# Altium PCB BrushServo_MG995.PcbDoc
Units mm, origin at the board's own origin, x right, y up, seen from the top; angles counter-clockwise.
Board outline 21 x 16 mm, 2 copper layers (Top Layer, Bottom Layer), stack 0.671 mm thick; 22 components, 28 nets, 130 pads, 48 vias.
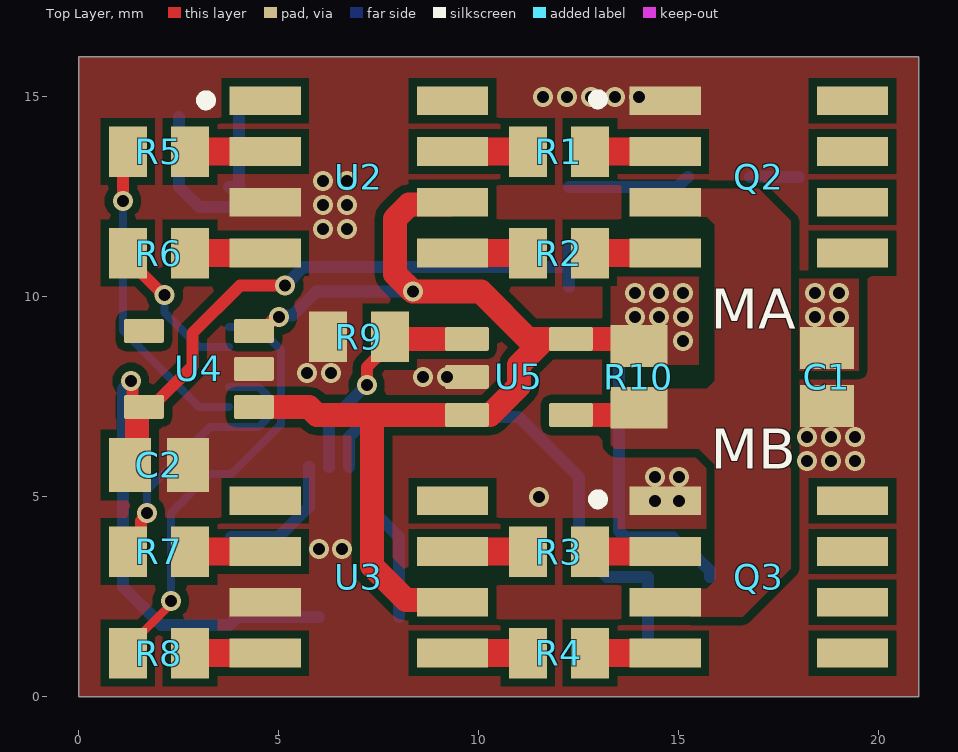
[diagram p0: Top Layer view]
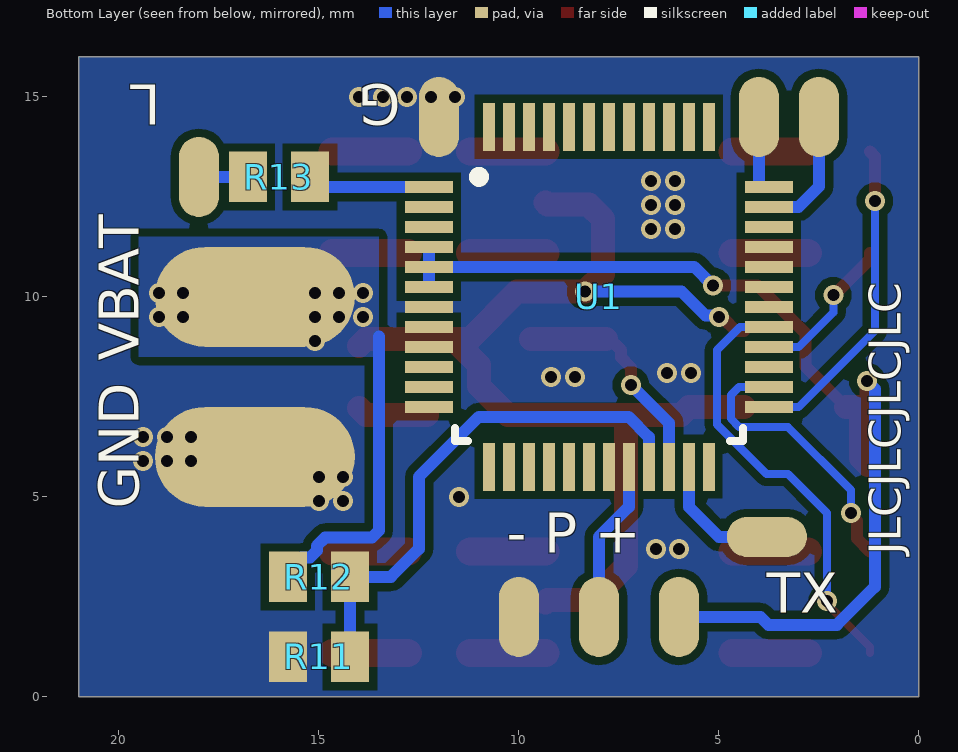
[diagram p1: Bottom Layer view, seen from below]
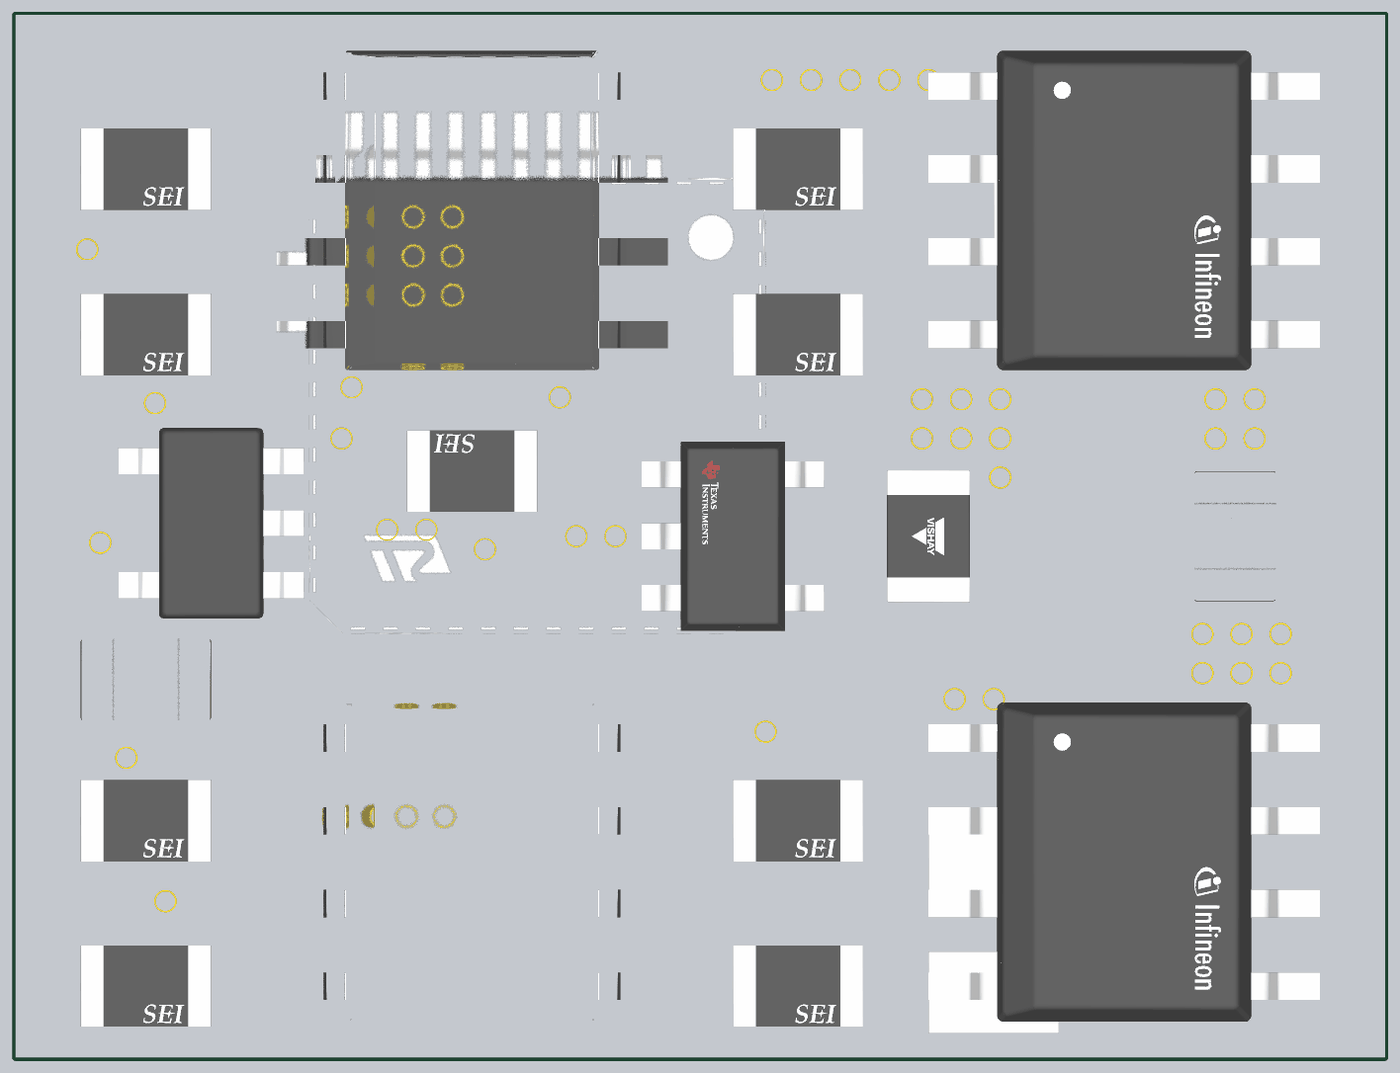
[diagram p2: 3D render of the assembled board from above, using the file's embedded part models]
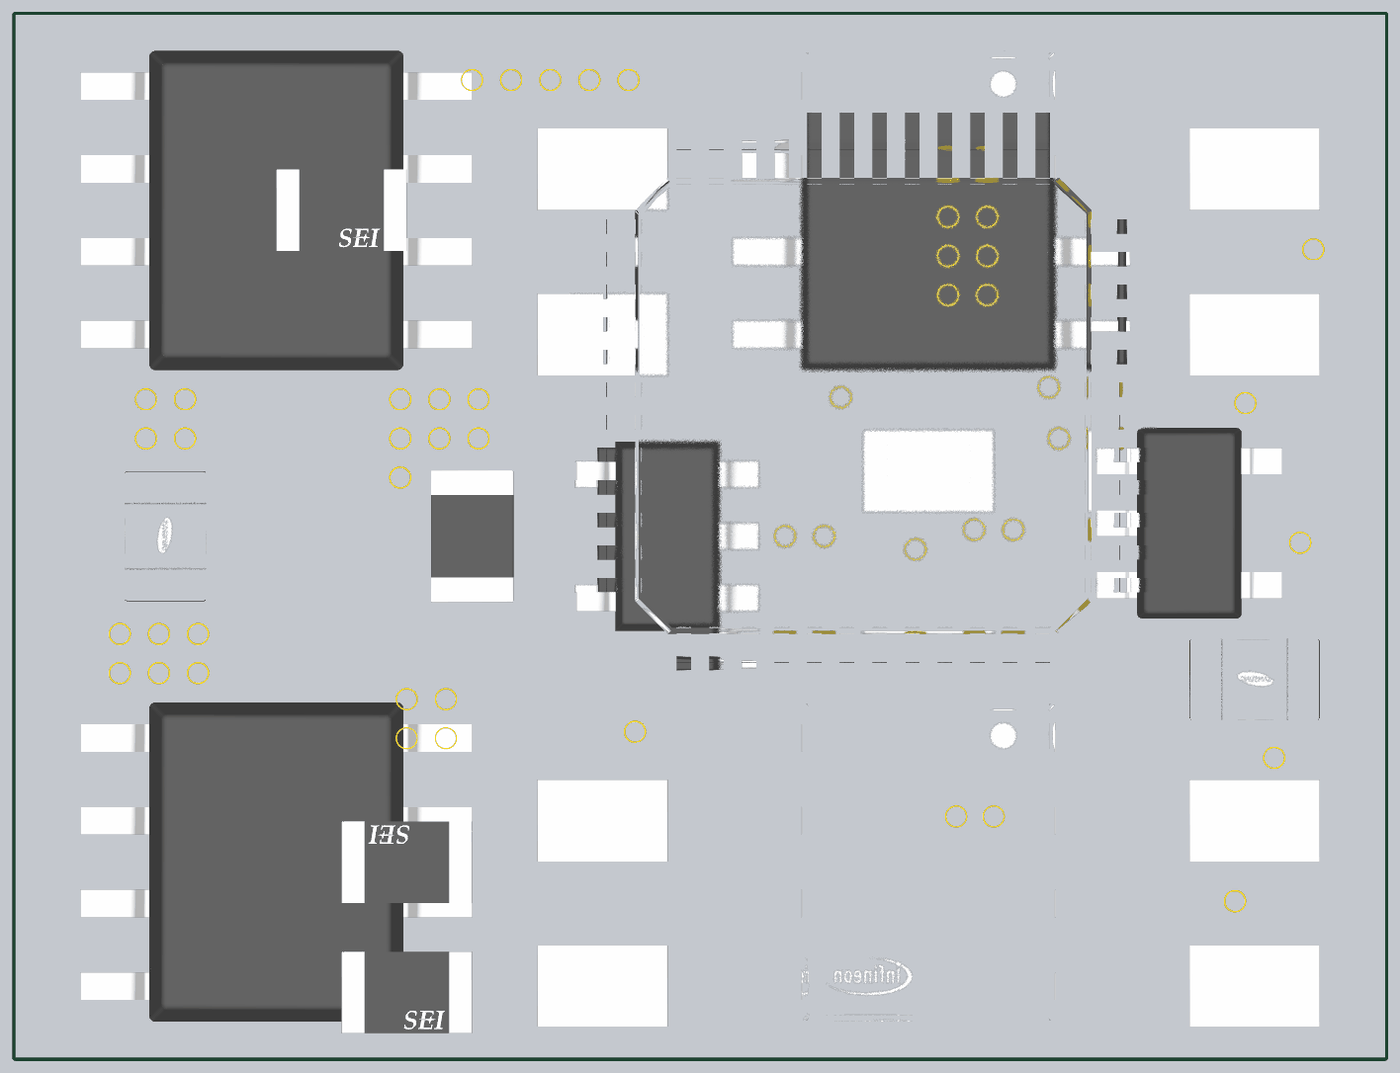
[diagram p3: 3D render of the assembled board from below, using the file's embedded part models]

## Layer stack, top to bottom
Top Solder: solder mask 0.0102, Solder Resist, Dk 3.5
Top Layer: signal copper 0.0356
Dielectric 1: dielectric 0.6, FR-4, Dk 4.8
Bottom Layer: signal copper 0.0356
Bottom Solder: solder mask 0.0102, Solder Resist, Dk 3.5

## Board outline
0,0 21,0 21,16 0,16

## Design rules (kind name [scope] priority, off if disabled: settings)
Clearance [All] p1: gap=0.2 ignorepadtopadclearanceinfootprint=TRUE except(0.15: Arc-Arc Arc-Track Track-Track; 0.3: Via-Via)
MinimumSolderMaskSliver [All] p1: minsoldermaskwidth=0.1
PolygonConnect [All] p1: connectstyle=Direct reliefconductorwidth=0.254 reliefentries=4 polygonreliefangle="90 Angle" airgapwidth=0.254
RoutingVias [All] p1: holewidth=0.3 width=0.5 viastyle="Through Hole" minholewidth=0.3 minwidth=0.5 maxholewidth=1 maxwidth=2
SolderMaskExpansion SolderMaskExpansion_via [IsVia] p1: expansion=0.102 istentingtop=TRUE
SolderMaskExpansion [All] p2: expansion=0.102 istentingtop=FALSE
Width [All] p1: maxlimit=1 minlimit=0.2 preferedwidth=0.3
29 further rules are at their usual default settings.

## Components (designator, comment, footprint, x,y, rotation, side; value= is the part's Value field where it differs from the comment)
C1 "CL21A106KOQNNNG" FP-CL21-IPC_C 18.7,8 r270 top
C2 "CL21A106KOQNNNG" FP-CL21-IPC_C 2,5.8 r0 top
Q2 "IRF7389TRPBF" FP-PG-DSO-8-MFG 17,13 r0 top
Q3 "IRF7389TRPBF" FP-PG-DSO-8-MFG 17,3 r0 top
R1 "RMCF0805FT10R0" FP-RMCF0805-IPC_C 12,13.635 r0 top
R2 "RMCF0805FT10R0" FP-RMCF0805-IPC_C 12,11.095 r0 top
R3 "RMCF0805FT10R0" FP-RMCF0805-IPC_C 12,3.635 r0 top
R4 "RMCF0805FT10R0" FP-RMCF0805-IPC_C 12,1.095 r0 top
R5 "RMCF0805FT330R" FP-RMCF0805-IPC_C 2,13.635 r0 top
R6 "RMCF0805FT330R" FP-RMCF0805-IPC_C 2,11.095 r0 top
R7 "RMCF0805FT330R" FP-RMCF0805-IPC_C 2,3.635 r0 top
R8 "RMCF0805FT330R" FP-RMCF0805-IPC_C 2,1.095 r0 top
R9 "RMCF0805FT10K0" FP-RMCF0805-IPC_C 7,9 r180 top
R10 "WSLP08055L000FEA18" FP-WSLP0805-IPC_C 14,8 r270 top
R11 "RMCF0805FT1K00" FP-RMCF0805-IPC_C 15,1 r180 bottom
R12 "RMCF0805FT2K67" FP-RMCF0805-IPC_C 15,3 r0 bottom
R13 "RMCF0805FT330R" FP-RMCF0805-IPC_C 16,13 r180 bottom
U1 "STM32G071CBT6" FP-LQFP48-5B-MFG 8,10 r180 bottom
U2 "IR4427STRPBF" FP-PG-DSO-8-MFG 7,13 r0 top
U3 "IR4427STRPBF" FP-PG-DSO-8-MFG 7,3 r0 top
U4 "TPS76333DBVR" DBV0005A_N 3,8.2 r180 top
U5 "INA169NA/250" FP-DBV0005A-MFG 11,8 r0 top

## Footprints (in the part's own frame and the unit in brackets; to place one, negate y for a bottom-side part, rotate by r counter-clockwise, add the part's x,y. Pads: shape width x height; smd on the part's side, far side on the other; paste and mask are expansions set on the pad)
DBV0005A_N [mm] "SOT23, 5-Leads, Body 3.05x1.75mm, Pitch 0.95mm, IPC Medium Density"
  rrect17% 1x0.6 smd: 1(-1.375,0.95) 2(-1.375,0) 3(-1.375,-0.95) 4(1.375,-0.95) 5(1.375,0.95)
  body extent -1.42,-1.46 1.42,1.46, height 1.08
FP-CL21-IPC_C [mm]
  rect 1.055x1.356 smd paste+0 mask+0: 1(-0.726,0) 2(0.726,0)
  body extent -1.35,-0.82 1.35,0.82, height 0.25
FP-DBV0005A-MFG [mm]
  rrect17% 1.1x0.6 smd paste+0 mask+0: 1(-1.3,0.95) 2(-1.3,0) 3(-1.3,-0.95) 4(1.3,-0.95) 5(1.3,0.95)
  body extent -1.95,-1.78 1.95,1.78, height 0.25
FP-LQFP48-5B-MFG [mm]
  rect 1.2x0.3 smd paste+0 mask+0: 1(-4.25,2.75) 2(-4.25,2.25) 3(-4.25,1.75) 4(-4.25,1.25) 5(-4.25,0.75) 6(-4.25,0.25) 7(-4.25,-0.25) 8(-4.25,-0.75) 9(-4.25,-1.25) 10(-4.25,-1.75) 11(-4.25,-2.25) 12(-4.25,-2.75) 25(4.25,-2.75) 26(4.25,-2.25) 27(4.25,-1.75) 28(4.25,-1.25) 29(4.25,-0.75) 30(4.25,-0.25) 31(4.25,0.25) 32(4.25,0.75) 33(4.25,1.25) 34(4.25,1.75) 35(4.25,2.25) 36(4.25,2.75)
  rect 0.3x1.2 smd paste+0 mask+0: 13(-2.75,-4.25) 14(-2.25,-4.25) 15(-1.75,-4.25) 16(-1.25,-4.25) 17(-0.75,-4.25) 18(-0.25,-4.25) 19(0.25,-4.25) 20(0.75,-4.25) 21(1.25,-4.25) 22(1.75,-4.25) 23(2.25,-4.25) 24(2.75,-4.25) 37(2.75,4.25) 38(2.25,4.25) 39(1.75,4.25) 40(1.25,4.25) 41(0.75,4.25) 42(0.25,4.25) 43(-0.25,4.25) 44(-0.75,4.25) 45(-1.25,4.25) 46(-1.75,4.25) 47(-2.25,4.25) 48(-2.75,4.25)
  silkscreen extent -3.6,-3.6 3.6,3.12, body extent -4.5,-4.5 4.5,4.5, height 1.6
FP-PG-DSO-8-MFG [mm]
  rect 1.78x0.72 smd paste+0 mask+0: 1(-2.34,1.905) 2(-2.34,0.635) 3(-2.34,-0.635) 4(-2.34,-1.905) 5(2.34,-1.905) 6(2.34,-0.635) 7(2.34,0.635) 8(2.34,1.905)
  silkscreen extent -4.15,1.82 -3.9,2.06, body extent -3.33,-2.68 3.33,2.68, height 0.25
FP-RMCF0805-IPC_C [mm]
  rect 0.955x1.262 smd paste+0 mask+0: 1(-0.776,0) 2(0.776,0)
  body extent -1.35,-0.77 1.35,0.77, height 0.25
FP-WSLP0805-IPC_C [mm]
  rect 1.043x1.429 smd paste+0 mask+0: 1(-0.773,0) 2(0.773,0)
  body extent -1.39,-0.86 1.39,0.86, height 0.25

## Part data
C1 C2: library part CMP-13271-002240-1, "CL21 Series 0805 10uF 16V ±10% Tolerance X5R Multilayer Ceramic Chip Capacitor", Capacitance=10uF, Case Code (Imperial)=0805, Case Code (Metric)=2012, Dielectric=X5R, Max Operating Temperature=85°C, Min Operating Temperature=-55°C, Package Quantity=3000, Tolerance=10%, Voltage=16V, Case/Package=0805, Depth=1.25mm, Height=1.25mm, Length=2mm, Material=Ceramic, Mount="Surface Mount", Packaging="Tape and Reel", Thickness=0.053inch, Voltage Rating=16V, Width=0.049inch
Q2 Q3: library part CMP-32901-000903-1, "MOSFET N/P-CH 30V 8-SOIC", Case/Package=SO, Continuous Drain Current (ID)=7.3A, Drain to Source Voltage (Vdss)=30V, Gate to Source Voltage (Vgs)=20V, Input Capacitance=650pF, Max Operating Temperature=150°C, Max Power Dissipation=2.5W, Min Operating Temperature=-55°C, Threshold Voltage=1V, Contact Plating=Tin, FET Type="N and P-Channel", Halogen Free="Halogen Free", Lead Free="Lead Free", Max Dual Supply Voltage=30V, Mount="Surface Mount", Number of Pins=8, Packaging="Cut Tape", Rds On Max=29mR, REACH SVHC="No SVHC", RoHS Compliant=Yes, Series=HEXFET®
R1 R2 R3 R4: library part CMP-26527-000052-1, "10Ω ±1% 0.125W 0805 Thick Film Chip Resistor AEC-Q200 compliant", Case Code (Imperial)=0805, Case Code (Metric)=2012, Max Operating Temperature=155°C, Max Power Dissipation=125mW, Min Operating Temperature=-55°C, Resistance=10R, Resistor Type="Thick Film", Temperature Coefficient=100ppm/°C, Tolerance=1%, Case/Package=0805, Construction=Rectangular, Contact Plating=Tin, Depth=1.25mm, Features="Automotive AEC-Q200", Height=0.026inch, Lead Free="Lead Free", Length=0.079inch, Military Standard=Not, Mount="Surface Mount", Number of Terminations=2, Packaging="Tape and Reel", Power Rating=125mW, Radiation Hardening=No, RoHS Compliant=Yes, Series=RMCF, Size Code=0805, Width=0.049inch
R5 R6 R7 R8 R13: library part CMP-26527-000132-1, "330Ω ±1% 0.125W 0805 Thick Film Chip Resistor AEC-Q200 compliant", Case Code (Imperial)=0805, Case Code (Metric)=2012, Max Operating Temperature=155°C, Max Power Dissipation=125mW, Min Operating Temperature=-55°C, Resistance=330R, Resistor Type="Thick Film", Temperature Coefficient=100ppm/°C, Tolerance=1%, Case/Package=0805, Construction=Rectangular, Contact Plating=Tin, Depth=1.25mm, Features="Automotive AEC-Q200", Height=0.026inch, Lead Free="Lead Free", Length=0.079inch, Military Standard=Not, Mount="Surface Mount", Number of Terminations=2, Packaging="Tape and Reel", Radiation Hardening=No, RoHS Compliant=Yes, Series=RMCF, Width=0.049inch
R9: library part CMP-26527-000121-1, "RES 10K OHM 1% 1/8W 0805", Case Code (Imperial)=0805, Case Code (Metric)=2012, Max Operating Temperature=155°C, Max Power Dissipation=125mW, Min Operating Temperature=-55°C, Resistance=10kR, Resistor Type="Thick Film", Temperature Coefficient=100ppm/°C, Tolerance=1%, Case/Package=0805, Construction=Rectangular, Contact Plating=Tin, Depth=1.25mm, Features="Automotive AEC-Q200", Height=0.026inch, Lead Free="Lead Free", Length=2mm, Military Standard=Not, Mount="Surface Mount", Number of Terminations=2, Packaging="Tape and Reel", Power Rating=125mW, Radiation Hardening=No, RoHS Compliant=Yes, Series=RMCF, Size Code=0805, Width=0.049inch
R10: library part CMP-02407-013125-1, "RES 0.005 OHM 1% 1W 0805", Case Code (Imperial)=0805, Case Code (Metric)=2012, Max Operating Temperature=170°C, Max Power Dissipation=1W, Min Operating Temperature=-65°C, Resistance=5mR, Resistance Tolerance=1%, Resistor Type="Metal Strip", Temperature Coefficient=110ppm/°C, Case/Package=0805, Features="Moisture Resistant", Height=0.023inch, Length=0.08inch, Number of Terminations=2, Packaging="Cut Tape", Power Rating=1W, RoHS Compliant=Yes, Series=WSLP-HP, Tolerance=1%, Width=0.05inch
R11: library part CMP-26527-002331-1, "1kΩ ±1% 0.125W 0805 Thick Film Chip Resistor AEC-Q200 compliant", Case Code (Imperial)=0805, Case Code (Metric)=2012, Max Operating Temperature=155°C, Max Power Dissipation=125mW, Min Operating Temperature=-55°C, Resistance=1kR, Resistor Type="Thick Film", Temperature Coefficient=100ppm/°C, Tolerance=1%, Case/Package=0805, Construction=Rectangular, Contact Plating=Tin, Depth=1.25mm, Features="Automotive AEC-Q200", Height=0.026inch, Lead Free="Lead Free", Length=2mm, Military Standard=Not, Mount="Surface Mount", Number of Terminations=2, Packaging="Tape and Reel", Power Rating=125mW, Radiation Hardening=No, RoHS Compliant=Yes, Series=RMCF, Size Code=0805, Width=0.049inch
R12: library part CMP-26527-000749-1, "2.67kΩ ±1% 0.125W 0805 Thick Film Chip Resistor AEC-Q200 compliant", Case Code (Imperial)=0805, Case Code (Metric)=2012, Max Operating Temperature=155°C, Max Power Dissipation=125mW, Min Operating Temperature=-55°C, Resistance=2.67kR, Resistor Type="Thick Film", Temperature Coefficient=100ppm/°C, Tolerance=1%, Case/Package=0805, Contact Plating=Tin, Features="Automotive AEC-Q200", Height=0.026inch, Lead Free="Lead Free", Length=0.079inch, Mount="Surface Mount", Number of Terminations=2, Packaging="Tape and Reel", Radiation Hardening=No, RoHS Compliant=Yes, Series=RMCF, Width=0.049inch
U1: library part CMP-12105-000052-1, "IC MCU 32BIT 128KB FLASH 48LQFP", Ambient Temperature Range High=+85°C, Ambient Temperature Range Low=-40°C, Frequency=64MHz, Manufacturer=STMicroelectronics, Max Junction Temp=+105°C, Max Supply Voltage=3.6V, Min Supply Voltage=1.55V, Package=LQFP48-5B, Temperature="-40°C to +85°C", Automotive=No, Category=IC, ComponentLink2Description=Datasheet, ComponentLink2URL=https://www.st.com/resource/en/datasheet/stm32g071cb.pdf, Core Architecture="ARM Cortex-M0+", Data Bus Width=32bits, Device Class L1="Integrated Circuits (ICs)", Device Class L2="Embedded Processors and Controllers", Device Class L3=Microcontrollers, Digikey Description="IC MCU 32BIT 128KB FLASH 48LQFP", Height=1.6mm, Interface=I2C,SPI,UART,USART,USB,LIN,IrDA,I2S,Other, Lead Free=Yes, Manufacturer Part Number=STM32G071CBT6, Memory Size=128KBytes, Memory Type=FLASH, Number Of A/D Converters=1, Number Of Adc Channels=17, Number Of Cores=1, Number Of I2C Channels=2, Number Of I/Os=44, Number Of Spi Channels=2, Number Of Timers/Counters=12, Number Of Uart Channels=5, Number Of Usb Channels=2, Octopart=https://octopart.com/stm32g071cbt6-stmicroelectronics-96627027, Ram Size=36KBytes, RoHS=TRUE, Standoff Height=0.05mm, Temperature Range High=+85°C, Temperature Range Low=-40°C
U2 U3: library part CMP-32851-000004-1, "IC GATE DRVR LOW-SIDE 8SOIC", Ambient Temperature Range High=+125°C, Ambient Temperature Range Low=-40°C, Manufacturer=Infineon, Max Junction Temp=+150°C, Max Power Dissipation=0.625W, Max Supply Voltage=20V, Min Supply Voltage=6V, Nominal Supply Current=100uA, Output Current=1.5A, Output Voltage=6-20V, Package=PG-DSO-8, Temperature="to +150°C", Automotive=No, Category=IC, ComponentLink2Description=Datasheet, ComponentLink2URL=https://www.infineon.com/dgdl/ir4426.pdf?fileId=5546d462533600a4015355d60b491822, Device Class L1="Integrated Circuits (ICs)", Device Class L2="Power Management ICs", Device Class L3="Gate Drivers", Digikey Description="IC GATE DRVR LOW-SIDE 8SOIC", Fall Time=10ns, Footprint Url=https://www.infineon.com/dgdl/Infineon-po-8leadsoic-P-v01_00-EN.pdf?fileId=5546d462580663ef0158068b4ad80177, Height=1.75mm, Ipc Land Pattern Name=SOIC127P600X155-8, Lead Free=Yes, Manufacturer Part Number=IR4427STRPBF, Number Of Drivers=2, Number Of Outputs=2, Octopart=https://octopart.com/ir4427strpbf-infineon-65873145, Rise Time=15ns, RoHS=TRUE, Standoff Height=0.1mm, Temperature Range High=+150°C, Turn Off Delay Time=65ns, Turn On Delay Time=85ns
U4: library part CMP-0394-00569-2, "Single Output LDO, 150 mA, Fixed 3.3 V Output, 2.7 to 10 V Input, with Low IQ, 5-pin SOT-23 (DBV), -40 to 125 degC, Green (RoHS & no Sb/Br)", Manufacturer="Texas Instruments", Accuracy(%)=3, Code_JEDEC=MO-178, ComponentLink1Description="Manufacturer URL", ComponentLink1URL=http://www.ti.com/, ComponentLink2Description=Datasheet, ComponentLink2URL=http://www.ti.com/general/docs/lit/getliterature.tsp?genericPartNumber=TPS76333&fileType=pdf, ComponentLink3Description="Package Specification", ComponentLink3URL=http://www.ti.com/litv/pdf/mpds018i, DatasheetVersion=SLVS181H, Eco-Plan="Green (RoHS & no Sb/Br)", Fixed Output Options(V)=3.3, Iout(Max)(A)=0.15, Iq(Typ)(mA)=0.08, Mounting Technology="Surface Mount", PackageDescription="5-Pin Plastic Small Outline, Body 1.60 Ãƒâ€” 2.90 mm, Pitch 0.95 mm", PackageReference=DBV0005A, PackageVersion=4073253-4/K, PartNumber=TPS76333DBVR, SubFamily="Single Channel LDO", Vdo(Typ)(mV)=300, Vin(Max)(V)=10, Vin(Min)(V)=2.7, Vout Adj(Max)(V)=3.3, Vout Adj(Min)(V)=3.3
U5: library part CMP-04910-000104-1, "IC CURRENT MONITOR 0.5% SOT23-5", Case/Package=SOT-23, Input Bias Current=10uA, Input Offset Voltage (Vos)=1mV, Max Input Voltage=60V, Max Operating Temperature=125°C, Min Input Voltage=2.7V, Min Operating Temperature=-40°C, Nominal Supply Current=60uA, Operating Supply Current=125uA, Operating Supply Voltage=28V, Accuracy=0.5%, Bandwidth=440kHz, Common Mode Rejection Ratio=100dB, Height=1.15mm, Lead Free="Lead Free", Length=2.9mm, Max Supply Voltage=60V, Min Supply Voltage=2.7V, Mount="Surface Mount", Number of Amplifiers=1, Number of Channels=1, Number of Elements=1, Number of Pins=5, Packaging="Tape and Reel", Radiation Hardening=No, REACH SVHC="No SVHC", RoHS Compliant=Yes, Series=INA169, Supply Current=60uA, Weight=0.000617oz, Width=1.6mm

## Free pads (board coordinates)
  oval 5x2.5 smd far side: PAD_GND(16.6,6) PAD_VBAT(16.6,10)
  oval 1x2 smd far side: ""(2.5,14.5) ""(4,14.5) ""(6,2) ""(8,2) ""(10,2) ""(12,14.5) ""(18,13)
  oval 2x1 smd far side: ""(3.8,4)

## Via types
v1: diameter 0.5, hole 0.3, Top Layer to Bottom Layer, tented both sides, 48 vias

## Nets (pads, with @x,y where several pads share a name; then routed paths per layer and width w, separated by ;. In a path a pad name is that pad's centre, name@x,y a point inside that pad or via, vN(x,y) a via of type N, cw(c..) or ccw(c..) an arc to the next point about the centre after c; other vN are vias at no path point)
3V3: C2.1 pad.@6,2 U1.4 U1.5 U1.6 U4.5 | length 26.6
  Top Layer w0.3: v1(1.3,7.9) 1.338,7.862 1.338,7.4 1.488,7.25 U4.5 ; U4.5@1.825,7.25 2.836,8.261 2.836,9.089 4.033,10.285 5.1,10.285 v1(5.154,10.285)
  Top Layer w0.6: C2.1 1.45,5.975 1.45,7.25 U4.5@1.488,7.25 ; U4.5 U4.5@1.825,7.25
  Bottom Layer w0.3: v1(1.3,7.9) 1.1,7.7 1.1,2.751 2.051,1.8 3.764,1.8 3.964,2 pad.@6,2 ; v1(5.154,10.285) 5.619,10.75 U1.5 ; U1.6 U1.5 ; U1.4 U1.5
GND: C1.2 C2.2 pad.@10,2 pad.@12,14.5 pad.PAD_GND Q2.1 Q3.1 R9.2 R11.1 U1.7 U2.3 U3.3 U4.2 U5.2
  other v1: 6,3.7 6.576,3.7 14.4,4.9 15,4.9 11.5,5 14.4,5.5 15,5.5 18.2,5.9 18.8,5.9 19.4,5.9 18.2,6.5 18.8,6.5 19.4,6.5 8.6,8 9.2,8 5.7,8.1 6.3,8.1 6.1,11.7 6.7,11.7 6.1,12.3 6.7,12.3 6.1,12.9 6.7,12.9 11.6,15 12.2,15 12.8,15 13.4,15 14,15
INA_OUT: R9.1 U1.22 U5.1 | length 5.8
  Top Layer w0.3: v1(7.2,7.8) 7.2,8.24 7.448,8.488 7.448,8.673 R9.1
  Top Layer w0.6: R9.1@7.826,8.95 U5.1
  Bottom Layer w0.3: U1.22 6.25,6.85 v1(7.2,7.8)
LED: pad.@18,13 R13.1 | length 1.2
  Bottom Layer w0.3: R13.1 pad.@18,13
MAH: R6.1 U1.28 | length 3.8
  Top Layer w0.3: R6.1 1.224,10.941 2.123,10.042 v1(2.141,10.042)
  Bottom Layer w0.2: v1(2.141,10.042) 2.141,9.614 3.005,8.75 U1.28
MAL: R5.1 U1.25 | length 8
  Top Layer w0.3: v1(1.1,12.4) 1.1,13.511 R5.1
  Bottom Layer w0.2: v1(1.1,12.4) 1.1,9.155 3.005,7.25 U1.25
MBH: R8.1 U1.29 | length 11
  Top Layer w0.2: R8.1 1.224,1.249 2.3,2.325 v1(2.3,2.4)
  Bottom Layer w0.2: v1(2.3,2.4) 2.3,4.6 3.271,5.571 3.811,5.571 5.05,6.81 5.05,8.672 4.472,9.25 U1.29
MBL: R7.1 U1.26 | length 7.1
  Top Layer w0.3: R7.1 1.552,3.962 1.552,4.397 1.7,4.546 v1(1.7,4.6)
  Bottom Layer w0.2: v1(1.7,4.6) 1.7,5.172 3.278,6.75 4.495,6.75 4.7,6.955 4.7,7.545 4.495,7.75 U1.26
NetQ2_2: Q2.2 R1.2 | length 1.9
  Top Layer w0.7: R1.2 Q2.2
NetQ2_4: Q2.4 R2.2 | length 1.9
  Top Layer w0.7: R2.2 Q2.4
NetQ3_2: Q3.2 R3.2 | length 1.9
  Top Layer w0.7: R3.2 Q3.2
NetQ3_4: Q3.4 R4.2 | length 1.9
  Top Layer w0.7: R4.2 Q3.4
NetR1_1: R1.1 U2.7 | length 1.9
  Top Layer w0.7: U2.7 R1.1
NetR2_1: R2.1 U2.5 | length 1.9
  Top Layer w0.7: U2.5 R2.1
NetR3_1: R3.1 U3.7 | length 1.9
  Top Layer w0.7: U3.7 R3.1
NetR4_1: R4.1 U3.5 | length 1.9
  Top Layer w0.7: U3.5 R4.1
NetR5_2: R5.2 U2.2 | length 1.9
  Top Layer w0.7: R5.2 U2.2
NetR6_2: R6.2 U2.4 | length 1.9
  Top Layer w0.7: R6.2 U2.4
NetR7_2: R7.2 U3.2 | length 1.9
  Top Layer w0.7: R7.2 U3.2
NetR8_2: R8.2 U3.4 | length 1.9
  Top Layer w0.7: R8.2 U3.4
NetR13_2: R13.2 U1.1 | length 3.1
  Bottom Layer w0.3: U1.1 14.974,12.75 R13.2
SWCLK: pad.@4,14.5 U1.36 | length 2
  Bottom Layer w0.3: U1.36 4,12.75 pad.@4,14.5
SWDIO: pad.@2.5,14.5 U1.35 | length 3.2
  Bottom Layer w0.3: pad.@2.5,14.5 2.5,12.755 3.005,12.25 U1.35
UART_TX: pad.@3.8,4 U1.23 | length 3.3
  Bottom Layer w0.3: pad.@3.8,4 5,4 5.75,4.75 U1.23
VBAT: C1.1 pad.PAD_VBAT R10.1 R12.2 U2.6 U3.6 U4.1 U4.3 U5.3 U5.5 | length 36.6
  Top Layer w0.3: U4.3 4.575,9.15 4.887,9.462 4.962,9.462 v1(5,9.5)
  Top Layer w0.6: U4.1 5.75,7.25 5.95,7.05 7.326,7.05 ; U3.6 9.28,2.425 8.175,2.425 7.326,3.274 7.326,7.05 ; U2.6 9.28,12.305 8.253,12.305 7.901,11.954 7.901,10.576 v1(8.347,10.131) 10.046,10.131 11.227,8.95 11.65,8.95 ; R10.1 13.823,8.95 U5.5 11.65,8.95 ; 7.326,7.05 U5.3 10.277,7.05 11,7.773 11,8.3 11.65,8.95
  Bottom Layer w0.3: v1(5,9.5) 5.038,9.538 5.338,9.538 5.931,10.131 v1(8.347,10.131) ; 13.5,9.014 13.5,4.157 13.676,3.981 14.847,3.981 15.052,3.776 15.052,3.657 15.227,3.481 15.448,3.481 15.776,3.154 R12.2
  other v1: 15.1,8.9 13.9,9.5 14.5,9.5 15.1,9.5 18.4,9.5 19,9.5 13.9,10.1 14.5,10.1 15.1,10.1 18.4,10.1 19,10.1
VBAT_IS: Q2.3 Q3.3 R10.2 U5.4 | length 1.8
  Top Layer w0.6: U5.4 13.823,7.05 R10.2
VBAT_VS: R11.2 R12.1 U1.21 | length 13.1
  Bottom Layer w0.3: U1.21 6.75,6.495 7.255,7 11,7 12.5,5.5 12.5,3.7 13.2,3 R12.1 R11.2
VPOT: pad.@8,2 U1.20 | length 4.1
  Bottom Layer w0.3: U1.20 7.25,4.75 8,4 pad.@8,2
pads on no net: Q2.5 Q2.6 Q2.7 Q2.8 Q3.5 Q3.6 Q3.7 Q3.8 U1.2 U1.3 U1.8 U1.9 U1.10 U1.11 U1.12 U1.13 U1.14 U1.15 U1.16 U1.17 U1.18 U1.19 U1.24 U1.27 U1.30 U1.31 U1.32 U1.33 U1.34 U1.37 U1.38 U1.39 U1.40 U1.41 U1.42 U1.43 U1.44 U1.45 U1.46 U1.47 U1.48 U2.1 U2.8 U3.1 U3.8 U4.4

## Polygon pours and split planes (outlines as drawn)
GND on Bottom Layer "GND_L02_P005" (solid, pour order 5): 0,0 0,16 21,16 21,0
VBAT on Bottom Layer "VBAT_L02_P001" (solid, pour order 1): 13.5,8.5 13.5,11.5 19.5,11.5 19.5,8.5
GND on Top Layer "GND_L01_P006" (solid, pour order 6): 0,0 0,16 21,16 21,0
VBAT on Top Layer "VBAT_L01_P004" (solid, pour order 4): 17.9,8.15 17.9,10.45 19.5,10.45 19.5,8.15
VBAT on Top Layer "VBAT_L01_P003" (solid, pour order 3): 13.3,8.3 13.3,10.5 15.5,10.5 15.5,8.3
VBAT_IS on Top Layer "VBAT_IS_L01_P000" (solid, pour order 0): 13.3,7.7 13.3,6.3 13.4,6.2 15.5,6.2 15.9,5.8 15.9,2.9 15.7,2.7 15.3,2.7 15.3,2 16.6,2 17.8,3.2 17.8,11.9 17,12.7 15.7,12.7 15.5,12.7 15.5,12 15.7,12 15.9,11.8 15.9,7.9 15.7,7.7

## Silkscreen, mask and mechanical layers (free items; w line width, h text height)
Top Overlay:
  text "MA" at 15.8,9.2 h1
  text "MB" at 15.8,5.7 h1
Bottom Overlay:
  text "G" at 12.95,15.3 h1 r180
  text "L" at 18.95,15.3 h1 r180
  text "VBAT" at 19.5,8.4 h1 r270
  text "GND" at 19.5,4.7 h1 r270
  text "- P +" at 10.3,3.6 h1
  text "JLCJLCJLCJLC" at 0.45,3.55 h0.8 r270
  text "TX" at 3.8,2.1 h1
Outline:
  lines w0.1: -0.05,0 ccw(c0,0) 0,-0.05 ; -0.05,0 ccw(c0,0) 0,-0.05 ; -0.05,0 -0.05,16 ; -0.05,16 cw(c0,16) 0,16.05 ; -0.05,16 cw(c0,16) 0,16.05 ; 0,-0.05 21,-0.05 ; 0,16.05 21,16.05 ; 21,-0.05 ccw(c21,0) 21.05,0 ; 21,-0.05 ccw(c21,0) 21.05,0 ; 21,16.05 cw(c21,16) 21.05,16 ; 21,16.05 cw(c21,16) 21.05,16 ; 21.05,0 21.05,16